# Altium PCB quark_dog_driver.PcbDoc (part 2 of 3)
Units mil, origin at the board's own origin, x right, y up, seen from the top; angles counter-clockwise.
Board outline 3937.01 x 2362.2 mil, 4 copper layers (Top Layer 1, signal1, signal2, Bottom Layer 1), stack 23.756 mil thick; 353 components, 275 nets, 1099 pads, 468 vias.
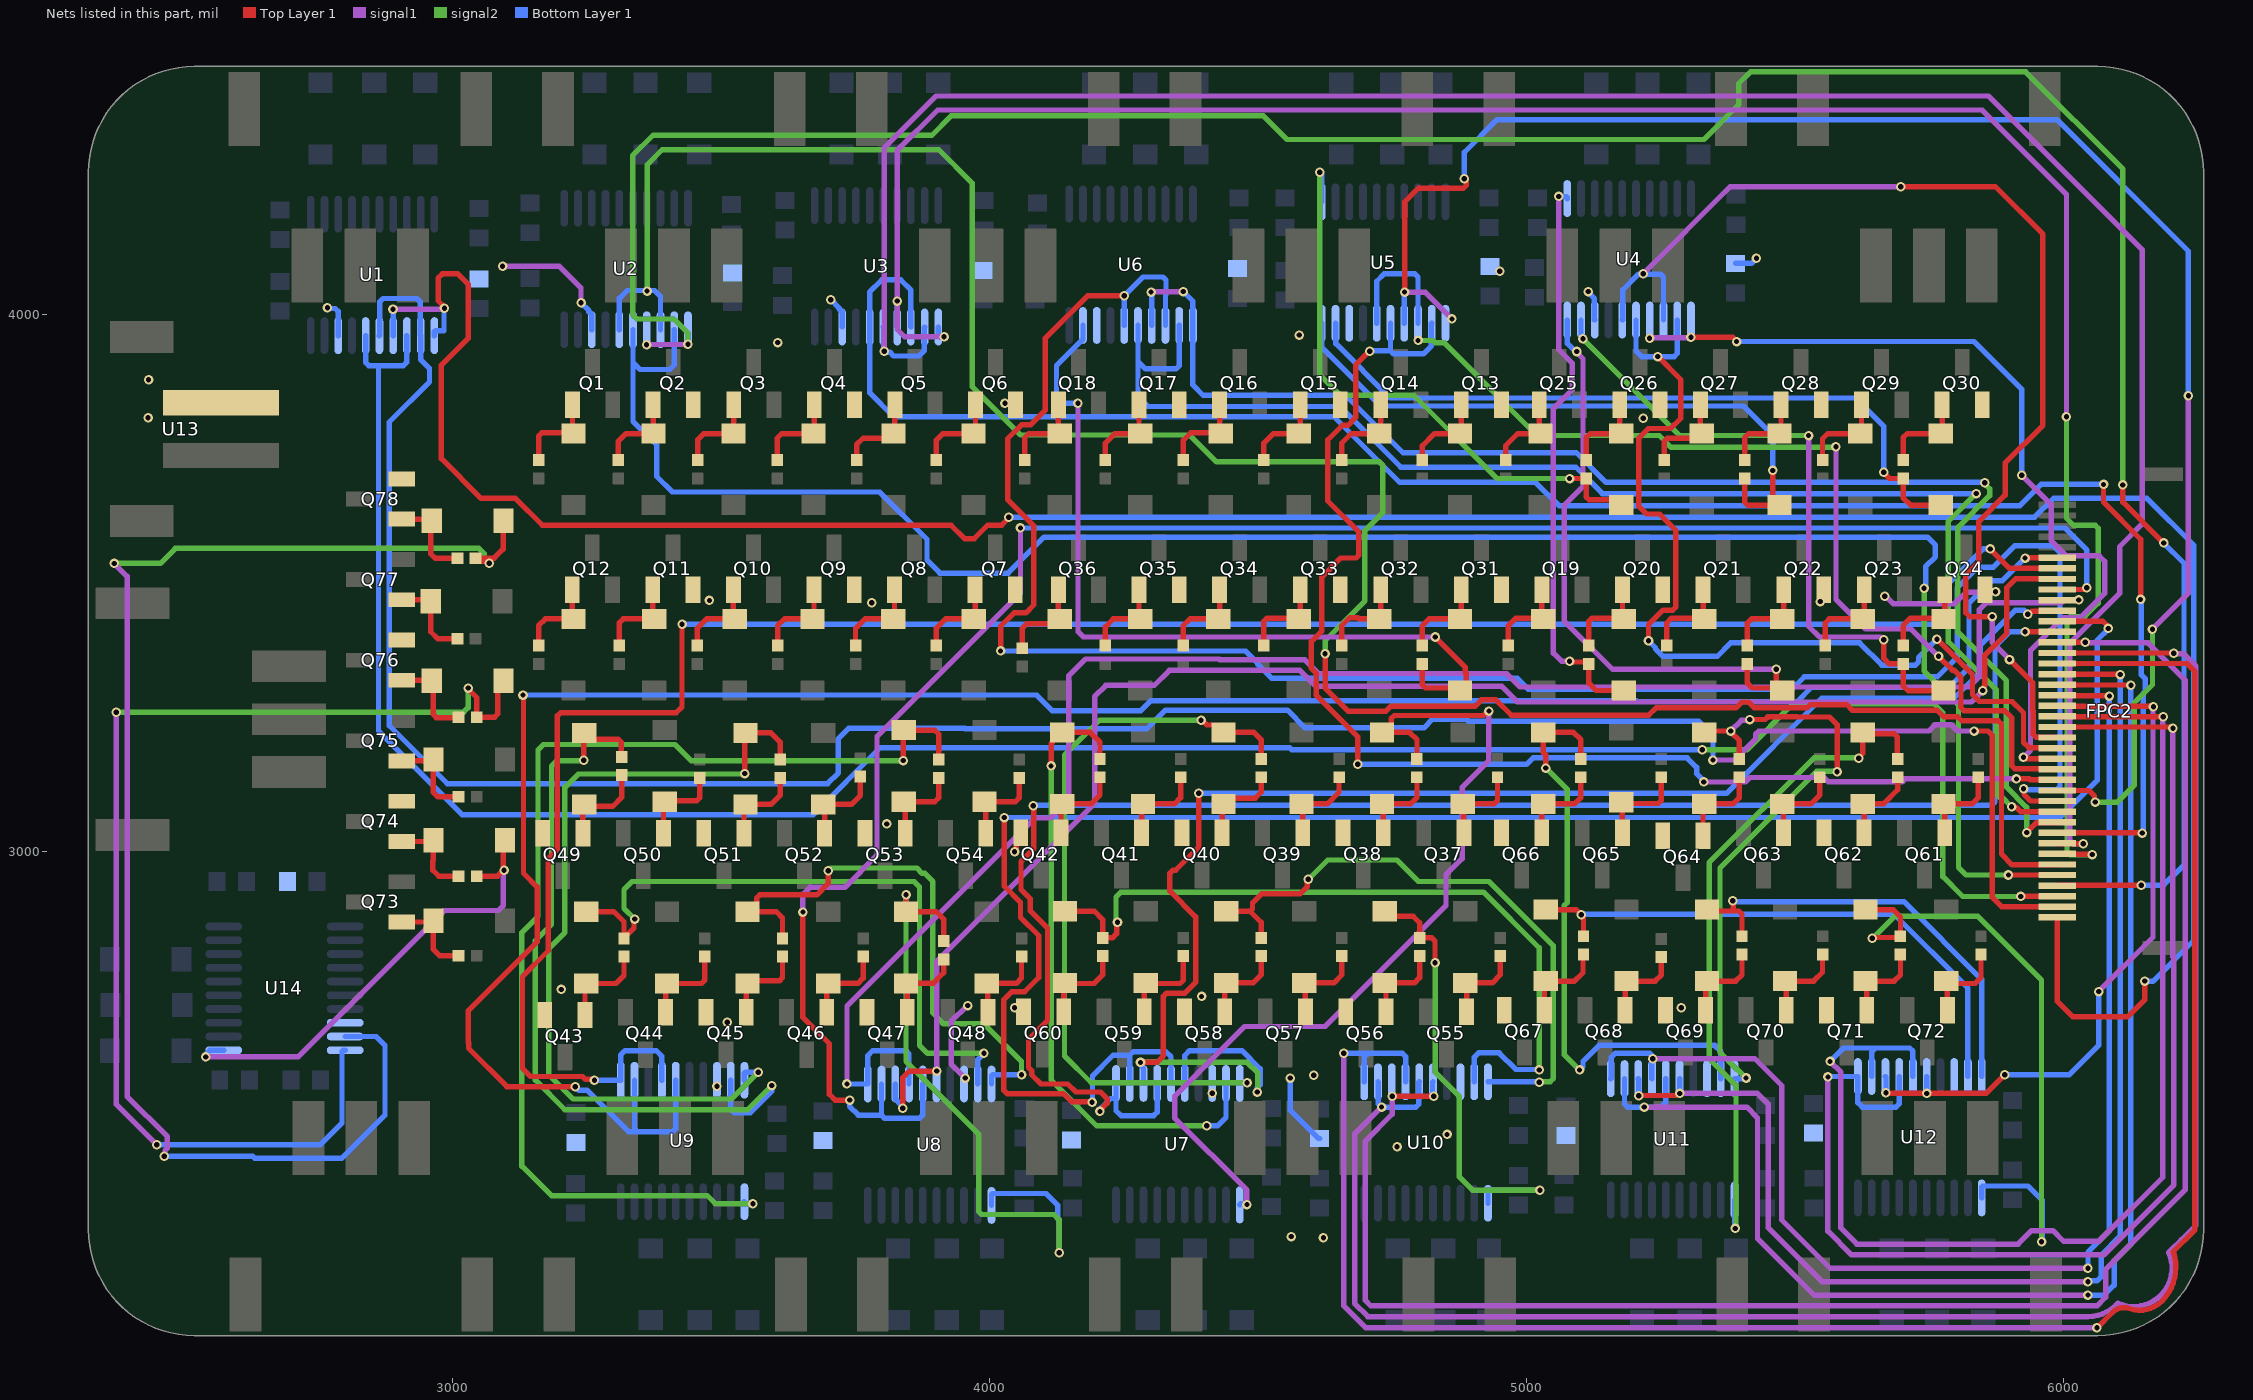
[diagram p4: the nets of this part, all layers, seen from the top]

## Via types
v1: diameter 17.72, hole 9.84, Top Layer 1 to Bottom Layer 1, tented both sides, 410 vias
v2: diameter 30, hole 15, Top Layer 1 to Bottom Layer 1, tented both sides, 54 vias
v3: diameter 78.74, hole 78.74, Top Layer 1 to Bottom Layer 1, 4 vias

## Nets (pads, with @x,y where several pads share a name; then routed paths per layer and width w, separated by ;. In a path a pad name is that pad's centre, name@x,y a point inside that pad or via, vN(x,y) a via of type N, cw(c..) or ccw(c..) an arc to the next point about the centre after c; other vN are vias at no path point) (continued)
LO4_3: D47.1 R32.1 U6.9 | length 1535.6
  Top Layer 1 w10: R32.1@4806,3349.99 4806,3310.86 4811.86,3305 4871.4,3305 D47.1@4876,3300.4 4887.58,3311.97 4887.58,3332.42 4885.86,3334.14 4885.86,3344.14 v1(4830,3400)
  signal1 w10: v1(4165,3835) 4165,3410 4175,3400 v1(4830,3400)
  Bottom Layer 1 w10: v1(4165,3835) 4135,3835 4125,3845 4125,3905 4155.71,3935.71 4155.82,3935.71 4170.82,3950.71 4170.96,3950.71 4174.3,3954.05 U6.9@4174.3,3980
LO5_1: D41.1 R26.1 U5.11 | length 1114.5
  Top Layer 1 w10: v1(5080,3695) R26.1@5111,3694.99 5111,3661 5116.86,3655.15 5166.25,3655.15 D41.1@5176,3645.4
  signal2 w10: v1(4615,4265) 4615,3888.69 4653.69,3850 4790,3850 4945,3695 v1(5080,3695)
  Bottom Layer 1 w10: v1(4615,4265) 4618.85,4261.15 U5.11@4618.85,4210.06
LO5_2: D42.1 R27.1 U5.10 | length 1199.2
  Top Layer 1 w10: R27.1@5406,3694.99 5406,3650.86 5411.86,3645 5470.61,3645 D42.1@5471,3645.4 5458.04,3658.36 v1(5458.04,3710.04)
  Bottom Layer 1 w10: U5.10@4618.85,3984 4618.85,3939.15 4728,3830 5403.78,3830 5458.04,3775.74 v1(5458.04,3710.04)
LO5_3: D44.1 R29.1 U5.9 | length 1360.6
  Top Layer 1 w10: v1(5665,3706.86) 5665,3705.37 5675.37,3694.99 R29.1@5701,3694.99 5701,3659 5714.6,3645.4 D44.1@5771,3645.4
  Bottom Layer 1 w10: U5.9@4644.44,3984 4644.96,3983.48 4644.96,3946.04 4746,3845 5612.04,3845 5665,3792.04 v1(5665,3706.86)
LO6_1: D32.1 R20.1 U4.11 | length 1074.4
  Top Layer 1 w10: v1(5080,3355) 5081.48,3353.52 5112.47,3353.52 R20.1@5116,3349.99 5116,3314 5129.6,3300.4 D32.1@5181,3300.4
  signal1 w10: v1(5060,4220) 5060,3935 5085,3910 5085,3860 5050,3825 5050,3370 5065,3355 v1(5080,3355)
  Bottom Layer 1 w10: v1(5060,4220) 5073.85,4220 5075.85,4218 U4.11@5075.85,4216.06
LO6_2: D33.1 R21.1 U4.10 | length 1164.8
  Top Layer 1 w10: R21.1@5411,3349.99 5411,3314 5420,3305 D33.1@5471.4,3305 ; v1(5465,3340) 5465,3311.4 D33.1@5471.4,3305 ; D33.1@5476,3300.4 D33.1@5471.4,3305
  signal1 w10: v1(5093.57,3931.43) 5093.57,3929.34 5105,3917.91 5105,3680 5070,3645 5070,3430 5160,3340 v1(5465,3340)
  Bottom Layer 1 w10: U4.10@5075.85,3990 5075.85,3946.26 5076.4,3945.71 5077.2,3945.71 5091.48,3931.43 v1(5093.57,3931.43)
LO6_3: D35.1 R23.1 U4.9 | length 1231.4
  Top Layer 1 w10: v1(5665,3395) 5665,3360 5675,3350 R23.1@5701,3349.99 5701,3309 5710,3300 5775.61,3300 D35.1@5776,3300.4
  signal1 w10: v1(5525,3775) 5525,3420 5545,3400 5660,3400 v1(5665,3395)
  signal2 w10: v1(5105,3955) 5285,3775 v1(5525,3775)
  Bottom Layer 1 w10: U4.9@5101.44,3990 5101.44,3961.7 5105,3958.14 v1(5105,3955)
LO7_1: D104.1 R71.1 U12.11 | length 1248.7
  Top Layer 1 w10: D104.1@5631,2892.6 5682.4,2892.6 5696,2879 R71.1@5696,2843.01 5693.57,2840.58 5645.08,2840.58 v1(5643.61,2839.11)
  signal2 w10: v1@5645,2840 5685,2880 5840,2880 5958.61,2761.39 v1(5958.61,2274.11)
  Bottom Layer 1 w10: U12.11@5847.15,2355.94 5847.15,2376.19 5849.15,2378.19 5933.19,2378.19 5960,2351.39 v1@5960,2275
LO7_2: D103.1 R70.1 U12.10 | length 833.2
  Top Layer 1 w10: D103.1@5336,2892.6 5338.6,2890 5385,2890 ; v1(5383.61,2909.11) 5385,2907.71 5385,2890 ; R70.1@5401,2843.01 5401,2884 5395,2890 5385,2890
  Bottom Layer 1 w10: v1@5385,2910 5387.5,2907.5 5702.5,2907.5 5847.15,2762.85 U12.10@5847.15,2582
LO7_3: D101.1 R68.1 U12.9 | length 1051.2
  Top Layer 1 w10: D101.1@5036,2892.6 5092.4,2892.6 5106,2879 R68.1@5106,2843.01
  Bottom Layer 1 w10: v1@5103.29,2883.63 5684.48,2883.63 5821.56,2746.56 U12.9@5821.56,2582
  other v1: 5101.9,2882.74
LO8_1: D95.1 R62.1 U11.11 | length 1276.7
  Top Layer 1 w10: v1(5618.61,3174.11) 5618.61,3176.19 5626,3183.58 D95.1@5626,3222.6 5628.6,3220 5684.14,3220 5690,3214.14 5690,3174.01 R62.1@5691,3173.01
  signal2 w10: v1(5388.61,2299.11) 5390,2300.5 5390,2565 5340,2615 5340,2980 5535,3175 v1@5620,3175
  Bottom Layer 1 w10: U11.11@5387.15,2351.94 5387.15,2302.85 v1@5390,2300
LO8_2: D96.1 R63.1 U11.10 | length 1141.3
  Top Layer 1 w10: D96.1@5331,3222.6 5333.39,3225 v1(5380,3225) 5380,3223.25 5396,3207.26 R63.1@5396,3173.01 ; v1(5415.33,3246.33) 5444.25,3246.33 5449.22,3251.3 5502.78,3251.3 5503.08,3251 5564,3251 5578.03,3236.97 v1(5578.03,3149.26)
  signal1 w10: v1(5380,3225) 5399.86,3244.86 5413.86,3244.86 v1(5415.33,3246.33)
  signal2 w10: v1(5408.61,2579.11) 5392.11,2595.61 5390.61,2595.61 5360,2626.21 5360,2970 5540,3150 v1@5580,3150
  Bottom Layer 1 w10: U11.10@5387.15,2578 5408,2578 v1@5410,2580
LO8_3: D98.1 R65.1 U11.9 | length 1107.2
  Top Layer 1 w10: v1@5036,3156.16 5036,3180 5031,3185 D98.1@5031,3222.6 5087.4,3222.6 5101,3209 R65.1@5101,3173.01
  signal2 w10: v1(5036.02,3156.14) 5075.86,3116.3 5075.86,2905.86 5070,2900 5070,2622.71 v1(5098.61,2594.11)
  Bottom Layer 1 w10: v1@5105,2600 5105,2610 5135,2640 5350,2640 5361.56,2628.44 U11.9@5361.56,2578
LO9_1: D86.1 R56.1 U10.11 | length 871.1
  Top Layer 1 w10: D86.1@4736,2889.5 4745.5,2880 4789.14,2880 4801,2868.15 R56.1@4801,2839.91 4823.82,2839.91 4829.68,2834.05 v1(4829.68,2793.87)
  signal2 w10: v1(4829.68,2793.87) 4830,2793.55 4830,2590 4875,2545 4875,2395 4900,2370 v1(5025,2370)
  Bottom Layer 1 w10: U10.11@4928.15,2345.94 4928.15,2368 4930.15,2370 v1(5025,2370)
LO9_2: D87.1 R57.1 U10.10 | length 1157.4
  Top Layer 1 w10: D87.1@4441,2889.5 4485.5,2889.5 ; R57.1@4506,2839.91 4506,2869 4485.5,2889.5 ; v1(4593.61,2949.11) 4592.13,2947.63 4592.13,2935.86 4578.27,2922 4507,2922 4490,2905 4490,2894.01 4485.5,2889.5
  signal2 w10: v1@4595,2950 4630,2985 4758.73,2985 4798.73,2945 4930,2945 5050,2825 5050,2578.32 5044.14,2572.47 5024.97,2572.47 v1(5023.61,2571.11)
  Bottom Layer 1 w10: U10.10@4928.15,2572 v1@5025,2572
LO9_3: D89.1 R59.1 U10.9 | length 1455.3
  Top Layer 1 w10: D89.1@4141,2889.5 4195.5,2889.5 4211,2874 R59.1@4211,2839.91 4229.14,2839.91 4237.13,2847.9 4237.13,2867.63 v1(4238.61,2869.11)
  signal2 w10: v1@4240,2870 4235.89,2874.11 4235.89,2915.9 4244.99,2925 4920,2925 5023.61,2821.39 v1(5023.61,2594.11)
  Bottom Layer 1 w10: U10.9@4902.56,2572 4902.56,2617.56 4910.86,2625.86 4949.14,2625.86 4980,2595 v1@5025,2595
LO10_1: D59.1 R38.1 U7.11 | length 1648.3
  Top Layer 1 w10: R38.1@4796,3173.01 4796,3209 4782.4,3222.6 D59.1@4731,3222.6 4734.31,3222.6 4748.01,3236.3 4748.01,3248.14 4753.87,3254 4920.28,3254 4928.43,3262.14 v1(4930,3262.14)
  signal1 w10: v1(4479.52,2343.47) 4479.52,2370.48 4345,2505 4345,2545 4475,2675 4625,2675 4850,2900 4850,2957.56 4880,2987.56 4880,3120 4930,3170 v1(4930,3262.14)
  Bottom Layer 1 w10: U7.11@4466.15,2342.94 4466.15,2343 4468.15,2345 v1@4480,2345
LO10_2: D60.1 R39.1 U7.10 | length 1379.4
  Top Layer 1 w10: v1(4394.14,3245) 4396.23,3245 4404.92,3236.3 4422.3,3236.3 D60.1@4436,3222.6 4492.6,3222.6 4506,3209.21 R39.1@4506,3173.01
  signal2 w10: v1@4395,3245 4205,3245 4140,3180 4140,2620 4189.72,2570.28 v1(4479.7,2570.28)
  Bottom Layer 1 w10: U7.10@4466.15,2569 4467.15,2570 v1@4480,2570
LO10_3: D62.1 R41.1 U7.9 | length 1198.1
  Top Layer 1 w10: v1(4115,3160) 4115,3201.61 4118.36,3204.97 4118.36,3208.9 4132.06,3222.6 D62.1@4136,3222.6 4187.6,3222.6 4206,3204.21 R41.1@4206,3173.01
  signal2 w10: v1(4115,3160) 4115,2575 4200,2490 v1(4405,2490)
  Bottom Layer 1 w10: v1(4405,2490) 4425,2490 4440.56,2505.56 U7.9@4440.56,2569
LO11_1: D68.1 R47.1 U8.11 | length 1253.9
  Top Layer 1 w10: v1(3845,2920) D68.1@3845,2888.6 3901.4,2888.6 3915,2875 R47.1@3915,2834.01
  signal2 w10: v1(3845,2920) 3845,2610 3980,2475 3980,2330.86 3985.86,2325 4120,2325 4130,2315 v1(4130,2253.83)
  Bottom Layer 1 w10: U8.11@4004.15,2341.94 4004.15,2362.14 4006.15,2364.14 4105.86,2364.14 4127.28,2342.72 4127.28,2317.55 4130,2314.84 v1(4130,2253.83)
LO11_2: D67.1 R46.1 U8.10 | length 1062
  Top Layer 1 w10: R46.1@3615,2839.01 3615,2877.21 3603.6,2888.6 D67.1@3550,2888.6 3553.31,2888.6 3567.01,2902.3 3567.01,2914.14 3572.87,2920 3679.14,2920 3700,2940.86 v1(3700,2965)
  signal2 w10: v1(3700,2965) 3705,2970 3865,2970 3875,2960 3880,2960 3895,2945 3895,2700 3915,2680 3990,2680 4060,2610 v1(4060,2585)
  Bottom Layer 1 w10: U8.10@4004.15,2568 4004.15,2583 4006.15,2585 v1(4060,2585)
LO11_3: D65.1 R44.1 U8.9 | length 1259.1
  Top Layer 1 w10: D65.1@3250,2888.6 3301.4,2888.6 3320,2870 R44.1@3320,2839.52 ; R44.1@3320,2839.01 R44.1@3320,2839.52 ; v1(3340,2875) 3338.52,2873.52 3338.52,2858.04 R44.1@3320,2839.52
  signal2 w10: v1(3340,2875) 3320,2895 3320,2930 3335,2945 3860,2945 3870,2935 3870,2640 3885,2625 v1(3990,2625)
  Bottom Layer 1 w10: U8.9@3978.56,2568 3978.56,2613.56 v1(3990,2625)
LO12_1: D77.1 R53.1 U9.11 | length 2133.8
  Top Layer 1 w10: v1(3840,3170) 3840,3225.63 D77.1@3841,3226.63 3898.37,3226.63 3906,3219 R53.1@3906,3172.04
  signal2 w10: v1(3560,2345) 3490,2345 3475,2360 3185,2360 3130,2415 3130,2850 3160,2880 3160,3190 3170,3200 3415,3200 3445,3170 v1(3840,3170)
  Bottom Layer 1 w10: U9.11@3544.15,2348.97 3544.15,2347 3546.15,2345 v1(3560,2345)
LO12_2: D76.1 R52.1 U9.10 | length 1542.6
  Top Layer 1 w10: v1(3545,3145.86) 3545,3220.63 D76.1@3546,3221.63 3593.37,3221.63 3611,3204 R52.1@3611,3172.04
  signal2 w10: v1(3545,3145.86) 3544.14,3145 3235,3145 3210,3120 3210,2850 3180,2820 3180,2585 3225,2540 3520,2540 v1(3570,2590)
  Bottom Layer 1 w10: U9.10@3544.15,2575.03 3544.15,2588 3546.15,2590 v1(3570,2590)
LO12_3: D74.1 R50.1 U9.9 | length 1458.7
  Top Layer 1 w10: v1(3245.03,3170.52) 3245.03,3220.66 D74.1@3246,3221.63 3257.63,3210 3309.14,3210 3315,3204.14 3315,3178.04 R50.1@3316,3177.04
  signal2 w10: v1@3245,3170 3195,3170 3185,3160 3185,2865 3155,2835 3155,2575 3210,2520 3550,2520 v1(3595,2565)
  Bottom Layer 1 w10: U9.9@3518.56,2575.03 3518.56,2521.44 3525.8,2514.2 3555.04,2514.2 3595,2554.16 v1(3595,2565)
LO13_1: D113.1 R74.1 U14.11 | length 893.9
  Top Layer 1 w10: R74.1@3045.9,2954.85 3084.85,2954.85 3095,2965 3095,3018.32 D113.1@3098.52,3021.84
  signal1 w10: v1(2541.26,2618.38) 2713.38,2618.38 2985.98,2890.98 3086.32,2890.98 3095.52,2900.18 v1@3095.52,2966.04
  Bottom Layer 1 w10: v1@2540,2615 2540,2621.79 2548.99,2630.78 U14.11@2574.94,2630.78
  other v1: 3096.78,2966.02
LO13_2: D114.1 R75.1 U14.10 | length 2201.6
  Top Layer 1 w10: v1(3030,3305) 3030,3303.05 3045.9,3287.15 R75.1@3045.9,3250.85 3079.14,3250.85 3085,3256.7 3085,3308.04 D114.1@3095.49,3318.53
  signal1 w10: v1(2375,3260) 2375,2530 v1(2450,2455)
  signal2 w10: v1(2375,3260) 3021.39,3260 3030,3268.61 v1(3030,3305)
  Bottom Layer 1 w10: v1(2450,2455) 2755,2455 2795,2495 2795,2628.78 2797,2630.78 U14.10@2801,2630.78
LO13_3: D116.1 R77.1 U14.9 | length 2669
  Top Layer 1 w10: v1(3069.23,3537.54) 3067.15,3537.54 3063.47,3541.21 3049.56,3541.21 R77.1@3043.93,3546.84 3078.16,3546.84 3095,3563.69 3095,3615.83 D116.1@3095.49,3616.32
  signal1 w10: v1(2371.01,3537.01) 2395,3513.01 2395,2545 2470,2470 2470,2448.33 2465.71,2444.04 2465.71,2435.15 v1(2464.23,2433.68)
  signal2 w10: v1(2371.01,3537.01) 2457.01,3537.01 2485,3565 3050,3565 3060.01,3554.99 3060.01,3548.84 3069.23,3539.62 v1(3069.23,3537.54)
  Bottom Layer 1 w10: v1(2464.23,2433.68) 2628.82,2433.68 2632.5,2430 2795,2430 2875,2510 2875,2640 2858.63,2656.37 U14.9@2801,2656.37
NetD4_2: D4.2 Q2.1 R2.2 | length 161.2
  Top Layer 1 w10: R2.2@3309,3729.07 3309,3764 3323.66,3778.66 D4.2@3374.9,3778.66 3374.18,3779.38 Q2.1@3374.18,3832.66
NetD5_2: D5.2 Q1.1 R1.2 | length 164
  Top Layer 1 w10: R1.2@3161,3729.07 3161,3774.14 3166.86,3780 3224.67,3780 3224.18,3780.49 Q1.1@3224.18,3832.66
NetD6_2: D6.2 Q4.1 R3.2 | length 166.8
  Top Layer 1 w10: R3.2@3605,3729.07 3605,3770 3613.67,3778.66 D6.2@3672.68,3778.66 3674.18,3780.16 Q4.1@3674.18,3832.66
NetD7_2: D7.2 Q3.1 R4.2 | length 163.7
  Top Layer 1 w10: R4.2@3457,3729.07 3457,3767 3468.66,3778.66 D7.2@3523.79,3778.66 3524.18,3779.05 Q3.1@3524.18,3832.66
NetD8_2: D8.2 Q6.1 R5.2 | length 167.2
  Top Layer 1 w10: R5.2@3901,3729.07 3901,3766 3913.66,3778.66 D8.2@3970.47,3778.66 3974.18,3782.37 Q6.1@3974.18,3832.66
NetD9_2: D9.2 Q5.1 R6.2 | length 161.1
  Top Layer 1 w10: R6.2@3753,3729.07 3753,3758 3765,3770 3812.91,3770 D9.2@3821.58,3778.66 3824.18,3781.26 Q5.1@3824.18,3832.66
NetD10_2: D10.2 Q8.1 R7.2 | length 164.3
  Top Layer 1 w10: R7.2@3751,3384.07 3751,3416 3768.66,3433.66 D10.2@3821,3433.66 3823.6,3436.26 Q8.1@3823.6,3487.66
NetD11_2: D11.2 Q7.1 R8.2 | length 164.3
  Top Layer 1 w10: R8.2@3901,3384.07 3901,3416 3918.66,3433.66 D11.2@3971,3433.66 3973.6,3436.26 Q7.1@3973.6,3487.66
NetD12_2: D12.2 Q10.1 R9.2 | length 164.2
  Top Layer 1 w10: R9.2@3456,3384.07 3456,3416 3473.66,3433.66 D12.2@3526,3433.66 3523.6,3436.07 Q10.1@3523.6,3487.66
NetD13_2: D13.2 Q9.1 R10.2 | length 162.3
  Top Layer 1 w10: R10.2@3606,3384.07 3606,3421 3618.66,3433.66 D13.2@3671,3433.66 3673.6,3436.26 Q9.1@3673.6,3487.66
NetD14_2: D14.2 Q11.1 R11.2 | length 165.1
  Top Layer 1 w10: R11.2@3311,3384.07 3311,3426 3318.66,3433.66 D14.2@3376,3433.66 3373.6,3436.07 Q11.1@3373.6,3487.66
NetD15_2: D15.2 Q12.1 R12.2 | length 162.2
  Top Layer 1 w10: R12.2@3161,3384.07 3161,3421 3173.66,3433.66 D15.2@3226,3433.66 3223.6,3436.07 Q12.1@3223.6,3487.66
NetD19_2: D19.2 Q14.1 R13.2 | length 164.3
  Top Layer 1 w10: R13.2@4656,3729.07 4656,3761 4673.66,3778.66 D19.2@4726,3778.66 4728.6,3781.26 Q14.1@4728.6,3832.66
NetD20_2: D20.2 Q13.1 R14.2 | length 161.4
  Top Layer 1 w10: R14.2@4806,3729.07 4806,3756 4828.66,3778.66 D20.2@4876,3778.66 4878.6,3781.26 Q13.1@4878.6,3832.66
NetD21_2: D21.2 Q16.1 R15.2 | length 166.4
  Top Layer 1 w10: R15.2@4361,3729.07 4361,3766 4375,3780 D21.2@4429.67,3780 ; Q16.1@4428.6,3832.66 4428.6,3781.07 D21.2@4429.67,3780 ; D21.2@4431,3778.66 D21.2@4429.67,3780
NetD22_2: D22.2 Q15.1 R16.2 | length 159.3
  Top Layer 1 w10: R16.2@4511,3729.07 4511,3761 4528.66,3778.66 D22.2@4576,3778.66 4578.6,3781.26 Q15.1@4578.6,3832.66
NetD23_2: D23.2 Q17.1 R17.2 | length 159.2
  Top Layer 1 w10: R17.2@4216,3729.07 4216,3761 4233.66,3778.66 D23.2@4281,3778.66 4278.6,3781.07 Q17.1@4278.6,3832.66
NetD24_2: D24.2 Q18.1 R18.2 | length 165.1
  Top Layer 1 w10: R18.2@4066,3729.07 4066,3771 4073.66,3778.66 D24.2@4131,3778.66 4128.6,3781.07 Q18.1@4128.6,3832.66
NetD31_2: D31.2 Q19.1 R19.2 | length 161.4
  Top Layer 1 w10: R19.2@4966,3384.07 4966,3421 4980,3435 D31.2@5029.67,3435 ; Q19.1@5028.6,3487.66 5028.6,3436.07 D31.2@5029.67,3435 ; D31.2@5031,3433.66 D31.2@5029.67,3435
NetD32_2: D32.2 Q20.1 R20.2 | length 166.2
  Top Layer 1 w10: R20.2@5116,3384.07 5116,3429.14 5121.86,3435 D32.2@5179.67,3435 ; Q20.1@5178.6,3487.66 5178.6,3436.07 D32.2@5179.67,3435 ; D32.2@5181,3433.66 D32.2@5179.67,3435
NetD33_2: D33.2 Q22.1 R21.2 | length 165.2
  Top Layer 1 w10: R21.2@5411,3384.07 5411,3426 5418.66,3433.66 D33.2@5476,3433.66 5478.6,3436.26 Q22.1@5478.6,3487.66
NetD34_2: D34.2 Q21.1 R22.2 | length 169.3
  Top Layer 1 w10: R22.2@5261,3384.07 5261,3426 5270,3435 D34.2@5329.67,3435 ; Q21.1@5328.6,3487.66 5328.6,3436.07 D34.2@5329.67,3435 ; D34.2@5331,3433.66 D34.2@5329.67,3435
NetD35_2: D35.2 Q24.1 R23.2 | length 173.4
  Top Layer 1 w10: R23.2@5701,3384.07 5701,3421 5715,3435 5774.67,3435 D35.2@5776,3433.66 5778.6,3436.26 Q24.1@5778.6,3487.66
NetD36_2: D36.2 Q23.1 R24.2 | length 170.2
  Top Layer 1 w10: R24.2@5556,3384.07 5556,3426 5563.66,3433.66 D36.2@5626,3433.66 5628.6,3436.26 Q23.1@5628.6,3487.66
NetD40_2: D40.2 Q25.1 R25.2 | length 156.3
  Top Layer 1 w10: R25.2@4961,3729.07 4961,3756 4983.66,3778.66 D40.2@5026,3778.66 5023.6,3781.07 Q25.1@5023.6,3832.66
NetD41_2: D41.2 Q26.1 R26.2 | length 165.1
  Top Layer 1 w10: R26.2@5111,3729.07 5111,3771 5118.66,3778.66 D41.2@5176,3778.66 5173.6,3781.07 Q26.1@5173.6,3832.66
NetD42_2: D42.2 Q28.1 R27.2 | length 165.2
  Top Layer 1 w10: R27.2@5406,3729.07 5406,3771 5413.66,3778.66 D42.2@5471,3778.66 5473.6,3781.26 Q28.1@5473.6,3832.66
NetD43_2: D43.2 Q27.1 R28.2 | length 166.1
  Top Layer 1 w10: R28.2@5256,3729.07 5256,3764.14 5261.86,3770 5317.34,3770 D43.2@5326,3778.66 5323.6,3781.07 Q27.1@5323.6,3832.66
NetD44_2: D44.2 Q30.1 R29.2 | length 170.2
  Top Layer 1 w10: R29.2@5701,3729.07 5701,3771 5708.66,3778.66 D44.2@5771,3778.66 5773.6,3781.26 Q30.1@5773.6,3832.66
NetD45_2: D45.2 Q29.1 R30.2 | length 169
  Top Layer 1 w10: R30.2@5551,3729.07 5551,3769 5560.67,3778.66 D45.2@5621,3778.66 5623.6,3781.26 Q29.1@5623.6,3832.66
NetD46_2: D46.2 Q32.1 R31.2 | length 169.1
  Top Layer 1 w10: R31.2@4656,3384.07 4656,3421 4670.86,3435.86 4686.17,3435.86 4688.36,3433.66 D46.2@4726,3433.66 4728.6,3436.26 Q32.1@4728.6,3487.66
NetD47_2: D47.2 Q31.1 R32.2 | length 167.3
  Top Layer 1 w10: R32.2@4806,3384.07 4806,3421 4818.66,3433.66 D47.2@4876,3433.66 4878.6,3436.26 Q31.1@4878.6,3487.66
NetD48_2: D48.2 Q34.1 R33.2 | length 162.3
  Top Layer 1 w10: R33.2@4361,3384.07 4361,3421 4373.66,3433.66 D48.2@4426,3433.66 4428.6,3436.26 Q34.1@4428.6,3487.66
NetD49_2: D49.2 Q33.1 R34.2 | length 168.1
  Top Layer 1 w10: R34.2@4511,3384.07 4511,3429.14 4516.86,3435 4574.67,3435 D49.2@4576,3433.66 4578.6,3436.26 Q33.1@4578.6,3487.66
NetD50_2: D50.2 Q35.1 R35.2 | length 161
  Top Layer 1 w10: R35.2@4216,3384.07 4216,3419 4230.67,3433.66 D50.2@4281,3433.66 4278.6,3436.07 Q35.1@4278.6,3487.66
NetD51_2: D51.2 Q36.1 R36.2 | length 169.2
  Top Layer 1 w10: R36.2@4061,3379.07 4061,3416 4070,3425 4122.34,3425 D51.2@4131,3433.66 4128.6,3436.07 Q36.1@4128.6,3487.66
NetD58_2: D58.2 Q37.1 R37.2 | length 165.7
  Top Layer 1 w10: Q37.1@4883.4,3035.34 4883.4,3086.93 D58.2@4881,3089.34 4939.34,3089.34 4946,3096 R37.2@4946,3138.93
NetD59_2: D59.2 Q38.1 R38.2 | length 162.8
  Top Layer 1 w10: Q38.1@4733.4,3035.34 4733.4,3086.93 D59.2@4731,3089.34 4784.34,3089.34 4796,3101 R38.2@4796,3138.93
NetD60_2: D60.2 Q40.1 R39.2 | length 162
  Top Layer 1 w10: Q40.1@4433.4,3035.34 4433.4,3086.74 D60.2@4436,3089.34 4446.66,3100 4495,3100 4506,3111 R39.2@4506,3138.93
NetD61_2: D61.2 Q39.1 R40.2 | length 161.9
  Top Layer 1 w10: Q39.1@4583.4,3035.34 4583.4,3086.93 D61.2@4581,3089.34 4629.34,3089.34 4651,3111 R40.2@4651,3138.93
NetD62_2: D62.2 Q42.1 R41.2 | length 164.9
  Top Layer 1 w10: Q42.1@4133.4,3035.34 4133.4,3086.74 D62.2@4136,3089.34 4189.34,3089.34 4206,3106 R41.2@4206,3138.93
NetD63_2: D63.2 Q41.1 R42.2 | length 167.8
  Top Layer 1 w10: Q41.1@4283.4,3035.34 4283.4,3086.74 D63.2@4286,3089.34 4344.34,3089.34 4356,3101 R42.2@4356,3138.93
NetD64_2: D64.2 Q44.1 R43.2 | length 171
  Top Layer 1 w10: Q44.1@3397.4,2701.34 3397.4,2752.07 3400.33,2755 3464.14,2755 3470,2760.86 R43.2@3470,2804.93
NetD65_2: D65.2 Q43.1 R44.2 | length 171.4
  Top Layer 1 w10: Q43.1@3247.4,2696.34 3247.4,2752.74 D65.2@3250,2755.34 3250.33,2755 3305,2755 3320,2770 R44.2@3320,2804.93
NetD66_2: D66.2 Q46.1 R45.2 | length 164
  Top Layer 1 w10: Q46.1@3697.4,2701.34 3697.4,2752.74 D66.2@3700,2755.34 3755.34,2755.34 3765,2765 R45.2@3765,2804.93
NetD67_2: D67.2 Q45.1 R46.2 | length 163.5
  Top Layer 1 w10: Q45.1@3547.4,2701.34 3547.4,2752.74 D67.2@3550,2755.34 3554.66,2760 3609.14,2760 3615,2765.86 R46.2@3615,2804.93
NetD68_2: D68.2 Q47.1 R47.2 | length 158.1
  Top Layer 1 w10: Q47.1@3847.4,2701.34 3847.4,2752.93 D68.2@3845,2755.34 3895.34,2755.34 3915,2775 R47.2@3915,2799.93
NetD69_2: D69.2 Q48.1 R48.2 | length 163.9
  Top Layer 1 w10: Q48.1@3997.4,2701.34 3997.4,2752.93 D69.2@3995,2755.34 4050.34,2755.34 4060,2765 R48.2@4060,2804.93
NetD73_2: D73.2 Q50.1 R49.2 | length 165.3
  Top Layer 1 w10: Q50.1@3393.4,3034.37 3393.4,3090.77 D73.2@3396,3093.37 3397.63,3095 3455.14,3095 3461,3100.86 R49.2@3461,3137.96
NetD74_2: D74.2 Q49.1 R50.2 | length 174.6
  Top Layer 1 w10: Q49.1@3243.4,3034.37 3243.4,3085.77 D74.2@3246,3088.37 3249.37,3085 3299.14,3085 3316,3101.86 R50.2@3316,3142.96
NetD75_2: D75.2 Q52.1 R51.2 | length 165.8
  Top Layer 1 w10: Q52.1@3693.4,3034.37 3693.4,3085.96 D75.2@3691,3088.37 3743.37,3088.37 3760,3105 R51.2@3760,3139.93
NetD76_2: D76.2 Q51.1 R52.2 | length 159.3
  Top Layer 1 w10: Q51.1@3543.4,3034.37 3543.4,3085.77 D76.2@3546,3088.37 3593.37,3088.37 3611,3106 R52.2@3611,3137.96
NetD77_2: D77.2 Q53.1 R53.2 | length 165.1
  Top Layer 1 w10: Q53.1@3843.4,3034.37 3843.4,3090.96 D77.2@3841,3093.37 3898.37,3093.37 3906,3101 R53.2@3906,3137.96
NetD78_2: D78.2 Q54.1 R54.2 | length 165.1
  Top Layer 1 w10: Q54.1@3993.4,3034.37 3993.4,3090.96 D78.2@3991,3093.37 4048.37,3093.37 4056,3101 R54.2@4056,3137.96
NetD85_2: D85.2 Q55.1 R55.2 | length 160.9
  Top Layer 1 w10: Q55.1@4888.4,2702.24 4888.4,2753.83 D85.2@4886,2756.24 4936.24,2756.24 4951,2771 R55.2@4951,2805.83
NetD86_2: D86.2 Q56.1 R56.2 | length 163.9
  Top Layer 1 w10: Q56.1@4738.4,2702.24 4738.4,2753.83 D86.2@4736,2756.24 4791.24,2756.24 4801,2766 R56.2@4801,2805.83
NetD87_2: D87.2 Q58.1 R57.2 | length 161
  Top Layer 1 w10: Q58.1@4438.4,2702.24 4438.4,2748.4 4441,2751 D87.2@4441,2756.24 4491.24,2756.24 4506,2771 R57.2@4506,2805.83
NetD88_2: D88.2 Q57.1 R58.2 | length 165.9
  Top Layer 1 w10: Q57.1@4588.4,2702.24 4588.4,2753.83 D88.2@4586,2756.24 4641.24,2756.24 4656,2771 R58.2@4656,2805.83
NetD89_2: D89.2 Q60.1 R59.2 | length 167
  Top Layer 1 w10: Q60.1@4138.4,2702.24 4138.4,2753.64 D89.2@4141,2756.24 4142.23,2755 4195,2755 4211,2771 R59.2@4211,2805.83
NetD90_2: D90.2 Q59.1 R60.2 | length 172.9
  Top Layer 1 w10: Q59.1@4288.4,2702.24 4288.4,2753.64 D90.2@4291,2756.24 4292.23,2755 4355,2755 4361,2761 R60.2@4361,2805.83
NetD94_2: D94.2 Q61.1 R61.2 | length 162.8
  Top Layer 1 w10: Q61.1@5778.4,3035.34 5778.4,3086.93 D94.2@5776,3089.34 5829.34,3089.34 5841,3101 R61.2@5841,3138.93
NetD95_2: D95.2 Q62.1 R62.2 | length 154
  Top Layer 1 w10: Q62.1@5628.4,3035.34 5628.4,3086.93 D95.2@5626,3089.34 5664.34,3089.34 5691,3116 R62.2@5691,3138.93
NetD96_2: D96.2 Q64.1 R63.2 | length 167.8
  Top Layer 1 w10: Q64.1@5328.4,3030.34 5328.4,3086.74 D96.2@5331,3089.34 5384.34,3089.34 5396,3101 R63.2@5396,3138.93
NetD97_2: D97.2 Q63.1 R64.2 | length 164.8
  Top Layer 1 w10: Q63.1@5478.4,3035.34 5478.4,3086.93 D97.2@5476,3089.34 5529.34,3089.34 5546,3106 R64.2@5546,3138.93
NetD98_2: D98.2 Q66.1 R65.2 | length 167.8
  Top Layer 1 w10: Q66.1@5028.4,3035.34 5028.4,3086.74 D98.2@5031,3089.34 5089.34,3089.34 5101,3101 R65.2@5101,3138.93
NetD99_2: D99.2 Q65.1 R66.2 | length 176.1
  Top Layer 1 w10: D99.2@5176,3092.37 5178.37,3090 5245,3090 5251,3096 R66.2@5251,3138.93 ; Q65.1@5178.4,3035.34 D99.2@5178.4,3089.97
NetD100_2: D100.2 Q68.1 R67.2 | length 157.8
  Top Layer 1 w10: Q68.1@5183.4,2705.34 5183.4,2756.74 D100.2@5186,2759.34 5239.34,2759.34 5251,2771 R67.2@5251,2803.93
NetD101_2: D101.2 Q67.1 R68.2 | length 166.9
  Top Layer 1 w10: Q67.1@5033.4,2705.34 5033.4,2756.74 D101.2@5036,2759.34 5089.34,2759.34 5105,2775 5105,2809.93 R68.2@5106,2808.93
NetD102_2: D102.2 Q70.1 R69.2 | length 164.8
  Top Layer 1 w10: Q70.1@5483.4,2705.34 5483.4,2756.93 D102.2@5481,2759.34 5534.34,2759.34 5551,2776 R69.2@5551,2808.93
NetD103_2: D103.2 Q69.1 R70.2 | length 162.8
  Top Layer 1 w10: Q69.1@5333.4,2705.34 5333.4,2756.74 D103.2@5336,2759.34 5389.34,2759.34 5401,2771 R70.2@5401,2808.93
NetD104_2: D104.2 Q71.1 R71.2 | length 162.8
  Top Layer 1 w10: Q71.1@5633.4,2705.34 5633.4,2756.93 D104.2@5631,2759.34 5684.34,2759.34 5696,2771 R71.2@5696,2808.93
NetD105_2: D105.2 Q72.1 R72.2 | length 165.9
  Top Layer 1 w10: D105.2@5781,2759.34 D105.2@5783.4,2756.93 ; Q72.1@5783.4,2705.34 D105.2@5783.4,2756.93 ; R72.2@5846,2808.93 5846,2766 5835,2755 5785.33,2755 D105.2@5783.4,2756.93
NetD112_2: D112.2 Q73.1 R73.2 | length 164.8
  Top Layer 1 w10: Q73.1@2906.25,2869.44 2962.85,2869.44 D112.2@2965.25,2871.84 2965.25,2818.44 2976.85,2806.85 R73.2@3011.82,2806.85
NetD113_2: D113.2 Q74.1 R74.2 | length 168.7
  Top Layer 1 w10: Q74.1@2906.25,3019.44 2962.85,3019.44 D113.2@2965.25,3021.84 2965.25,2984.21 2964.14,2983.1 2964.14,2965.86 2975.15,2954.85 R74.2@3011.82,2954.85
NetD114_2: D114.2 Q76.1 R75.2 | length 169.8
  Top Layer 1 w10: Q76.1@2906.25,3319.44 2961.31,3319.44 D114.2@2962.22,3318.53 2965,3315.75 2965,3255.86 2970.86,3250 3010.97,3250 R75.2@3011.82,3250.85
NetD115_2: D115.2 Q75.1 R76.2 | length 171.1
  Top Layer 1 w10: Q75.1@2906.25,3169.44 2962.85,3169.44 D115.2@2965.25,3171.84 2965.25,3110.44 2972.85,3102.85 R76.2@3011.82,3102.85
NetD116_2: D116.2 Q78.1 R77.2 | length 172.7
  Top Layer 1 w10: Q78.1@2906.25,3619.44 2959.1,3619.44 D116.2@2962.22,3616.32 2960,3614.1 2960,3555 2968.16,3546.84 R77.2@3009.85,3546.84
NetD117_2: D117.2 Q77.1 R78.2 | length 167.1
  Top Layer 1 w10: Q77.1@2906.25,3469.44 2957.65,3469.44 D117.2@2960.25,3466.84 2960.25,3409.75 2973.16,3396.84 R78.2@3009.85,3396.84
PGND: C1.1 C8.1 C12.1 C13.1 C17.1 C24.1 C25.1 C32.1 C36.1 C37.1 C41.1 C48.1 C49.1 Q2.2 Q4.2 Q6.2 Q7.2 Q9.2 Q11.2 Q13.2 Q15.2 Q17.2 Q20.2 Q22.2 Q24.2 Q26.2 Q28.2 Q30.2 Q31.2 Q33.2 Q35.2 Q38.2 Q40.2 Q42.2 Q43.2 Q45.2 Q47.2 Q49.2 Q51.2 Q53.2 Q56.2 Q58.2 Q60.2 Q62.2 Q64.2 Q66.2 Q67.2 Q69.2 Q71.2 Q74.2 Q76.2 Q78.2 U1.8 U2.8 U3.8 U4.8 U5.8 U6.8 U7.8 U8.8 U9.8 U10.8 U11.8 U12.8 U13.1 U14.8 | length 1058.5
  Top Layer 1 w10: v1(4047,3000) 4047,3002.09 4049.82,3004.9 4049.82,3026.56 Q42.2@4058.59,3035.34 ; v1(5546.86,3465.95) 5553.4,3472.5 Q22.2@5553.4,3487.66
  signal1 w10: v1(3094,4090) 3200,4090 3240,4050 v1(3240,4022) ; v1(3955,2579) 3929,2605 3929,2684 3959,2714 v1(3960,2714) ; v1(5666.7,3475.67) 5668.79,3475.67 5682.46,3462 5797,3462 5818,3483 5872,3483 v1(5873,3484)
  Bottom Layer 1 w10: v1(2768,4013) 2769.48,4011.52 2782.55,4011.52 2787.93,4006.14 U1.8@2787.93,3961 ; v1(3240,4022) 3240.09,4022 3254.61,4007.48 3254.61,4005.72 3260.03,4000.3 U2.8@3260.03,3972 ; v1(3705,4028) 3705.09,4028 3720.61,4012.48 3720.61,4010.72 3726.03,4005.3 U3.8@3726.03,3977 ; v1(4560,2579) 4560,2519.23 4612.82,2466.41 C37.1@4614.78,2466.41 ; v1(5115,4043) 5115,4040.91 5126.21,4029.71 5126.21,3990.83 U4.8@5127.03,3990 ; C13.1@5389.22,4095.59 5418.58,4095.59 v1(5428,4105)
  other v1: 4622,2282 4562,2284 4759,2451 4852,2474 4415,2551 3493,2564 4603.86,2584 3512,2683 4047,2710 5288,2710 4395,2731 3203,2744 3809,3052 3781,3464 3479,3468 5217,3807 2434,3808 4029,3835 2435,3879 3606,3948 4577,3962 4950,4081
PWM1_1: FPC2.1 U1.1 U1.4 | length 5318.7
  Top Layer 1 w10: v1(2985.69,4012.12) 2985.69,4014.21 2974,4025.91 2974,4068 2982,4076 3011,4076 3030,4057 3030,3956 2980,3906 2980,3731.89 3053.72,3658.16 3117.84,3658.16 3168,3608 3929,3608 3954,3583 3972,3583 3997,3608 4023,3608 4036,3621 v1(4036,3623) v1@4036,3625 ; FPC2.1@5987.77,2878.17 5987.77,2722.23 6017,2693 6119,2693 6150.5,2724.5 v1(6150.5,2759.5)
  signal1 w10: v1(2890,4010) v1@2985,4010
  Bottom Layer 1 w10: v1(2890,4010) 2890.29,4009.71 U1.4@2890.29,3961 ; U1.1@2967.06,3961 2967.06,3968 2969.06,3970 2985,3970 2985,4011.43 v1(2985.69,4012.12) ; v1(4036,3623) 5945.91,3623 5980.91,3658 6155,3658 6242,3571 6242,2835 6166,2759 6151,2759 v1(6150.5,2759.5) v1@6150,2760
PWM1_2: FPC2.2 U1.2 U1.5 | length 4632.1
  Top Layer 1 w10: v1(5833,3225) 5859.05,3225 5867,3217.05 5867,2915 5884,2898 FPC2.2@5976,2898
  signal1 w10: v1(5347,3171) 5387,3171 5426.52,3210.52 5426.52,3219.14 5432.38,3225 5749.15,3225 5761.15,3237 5790.03,3237 5802.03,3225 v1(5833,3225)
  Bottom Layer 1 w10: U1.5@2864.7,3961 2865.53,3961.83 2865.53,4024.14 2871.39,4030 2934.78,4030 2940.64,4024.14 2940.64,3961.83 U1.2@2941.47,3961 2941.47,3916.53 2958,3900 2958,3875 2883,3800 2883,3235 2991,3127 3699,3127 3719,3147 3719,3211 3738,3230 3954,3230 3955,3229 4293,3229 4328,3264 4555,3264 4588,3231 4809,3231 4825,3247 4888,3247 4892,3243 5321,3243 5347,3217 v1(5347,3171)
PWM1_3: FPC2.3 U1.3 U1.6 | length 4467.4
  Top Layer 1 w10: v1(5920,2917) 5920.27,2917.27 5987.5,2917.27 FPC2.3@5987.77,2917.54
  signal2 w10: v1(5327,3190) 5410,3190 5496,3276 5758,3276 5775,3259 5775,2954 5812,2917 v1(5920,2917)
  Bottom Layer 1 w10: U1.6@2839.11,3961 2839.11,3910.89 2845,3905 2863,3905 ; U1.3@2915.85,3960.97 2915.85,3911.71 2909.14,3905 2863,3905 ; v1(5327,3190) 4562.96,3190 4558.96,3194 3797,3194 3672,3069 3019,3069 2863,3225 2863,3905
PWM2_1: FPC2.4 U2.1 U2.4 | length 5078.8
  Top Layer 1 w10: FPC2.4@5987.77,2937.22 5988.16,2937.61 6143.61,2937.61 v1(6144,2938) ; v1(6110,3683) 6110,3651 v1(6186,3575)
  signal1 w10: v1(3362,3944) 3362.5,3944.5 3438.5,3944.5 v1(3439,3945)
  signal2 w10: v1(3439,3945) 3439,3966 3413,3992 3343.86,3992 3338,3997.86 3338,3998 3336,4000 3336,4296 3374,4334 3893,4334 3929,4370 4510,4370 4554,4326 5330,4326 5395,4391 5395,4430.14 5416.86,4452 5929,4452 6110,4271 v1(6110,3683)
  Bottom Layer 1 w10: v1(6144,2938) 6186,2938 6223.72,2975.72 6223.72,3537.28 v1(6186,3575)
PWM2_2: FPC2.5 U2.2 U2.5 | length 3778.8
  Top Layer 1 w10: v1(5897,2957) v1(5897,2957) 5987.73,2956.95 FPC2.5@5987.77,2956.91
  signal2 w10: v1(5740,3491) 5740,3337 5804,3273 5804,2971 5818,2957 v1(5897,2957)
  Bottom Layer 1 w10: U2.5@3336.81,3972 3336.81,3911.19 ; U2.2@3413.58,3972 3413.58,3906.44 3405.14,3898 3350,3898 3336.81,3911.19 ; v1(5740,3491) 5743,3494 5743,3531 5761,3549 5761,3571 5746,3586 4102,3586 4035,3519 3908,3519 3884,3543 3884,3582 3796,3670 3410,3670 3381,3699 3381,3757 3336.81,3801.19 3336.81,3911.19
PWM2_3: FPC2.6 U2.3 U2.6 | length 4431.7
  Top Layer 1 w10: v1(4625,3369) 4625,3305 4668,3262 4738,3262 4747,3271 4904,3271 4916,3283 4943,3283 4971.66,3254.34 5227.34,3254.34 5241,3268 5390,3268 5401,3279 5413,3279 5424,3268 5522.5,3268 5528.5,3274 5596,3274 5606,3264 5764,3264 5776.69,3251.3 5802.78,3251.3 5810.08,3244 5878,3244 5884,3238 5884,2996 5904,2976 5987.18,2976 FPC2.6@5987.77,2976.59
  signal2 w10: v1(3363,4044) 3363,4279 3391,4307 3906,4307 3968,4245 3968,3866 4058,3776 4373,3776 4423,3726 4726,3726 4732,3720 4732,3631 4699,3598 4699,3467 4625,3393 v1(4625,3369)
  Bottom Layer 1 w10: U2.6@3311.22,3972 3311.22,4030.22 3326,4045 3377.14,4045 3387.99,4034.16 U2.3@3387.99,3972
PWM3_1: FPC2.7 U3.1 U3.4 | length 4201.8
  Top Layer 1 w10: FPC2.7@5987.77,2996.28 5988.41,2995.64 6052.36,2995.64 v1(6053,2995)
  signal1 w10: v1(3915.7,3958.85) 3842.41,3958.85 3828.4,3972.86 v1(3828.4,4025.4) 3828.4,4305.4 3904,4381 5848,4381 6005,4224 v1(6005,3810)
  signal2 w10: v1(6005,3810) 6005,3621 6018,3608 6058.28,3608 6064.14,3602.14 6064.14,3554.14 6064,3554 6064,3463 6039,3438 6011.86,3438 6006,3432.14 6006,3000.86 6011.86,2995 v1(6053,2995)
  Bottom Layer 1 w10: U3.4@3828.4,3977 v1(3828.4,4025.4) v1@3829,4026 ; U3.1@3905.17,3977 3905.17,3960.85 3907.17,3958.85 v1(3915.7,3958.85)
PWM3_2: FPC2.8 U3.2 U3.5 | length 4282.8
  Top Layer 1 w10: FPC2.8@5987.77,3015.97 5988.26,3015.48 6035.52,3015.48 v1(6036,3015)
  signal1 w10: v1(3804.33,3931.72) 3804.33,4310.33 3901,4407 5860,4407 6146,4121 6146,3610 6104,3568 6104,3481 6011,3388 6011,3022 6018,3015 v1(6036,3015)
  Bottom Layer 1 w10: U3.5@3802.81,3977 3803.57,3976.24 3803.57,3932.48 v1(3804.33,3931.72) 3805.81,3930.24 3814.76,3930.24 3822,3923 3869,3923 3878.75,3932.75 3878.75,3976.17 U3.2@3879.58,3977
PWM3_3: FPC2.9 U3.3 U3.6 | length 3593.5
  Top Layer 1 w10: FPC2.9@5987.77,3035.65 5988.1,3035.32 6145.68,3035.32 v1(6146,3035) ; v1(6074,3684) 6074,3651 6143,3582 v1(6143,3470)
  Bottom Layer 1 w10: U3.3@3853.99,3977 3854,4046 3835,4065 3800,4065 3777.22,4042.22 U3.6@3777.22,3977 3777.22,3854.78 3822,3810 4642,3810 4764,3688 5017.05,3688 5061.05,3644 5918,3644 5958,3684 v1(6074,3684) ; v1(6143,3470) 6144,3469 6144,3330 6152,3322 6152,3299 6148,3295 6148,3037 v1(6146,3035)
PWM4_1: FPC2.10 U6.1 U6.4 | length 2650.7
  Top Layer 1 w10: v1(5931,3036) 5949.43,3054.43 5986.87,3054.43 FPC2.10@5987.77,3055.34
  signal1 w10: v1(4301,4042) 4301.5,4042.5 4360.5,4042.5 v1(4361,4043)
  signal2 w10: v1(5853,3687) 5853,3684.91 5862,3675.91 5862,3663 5803,3604 5803,3409 5893,3319 5893,3121 5931,3083 v1(5931,3036)
  Bottom Layer 1 w10: v1(4301,4042) 4302.25,4040.75 U6.4@4302.25,3980 ; v1(4361,4043) 4379.02,4024.98 U6.1@4379.02,3980 4379.02,3868.98 4398,3850 4663,3850 4770,3743 5093,3743 5148,3688 5852,3688 v1(5853,3687)
PWM4_2: FPC2.11 U6.2 U6.5 | length 2675.6
  Top Layer 1 w10: v1(5902.86,3084) 5904.33,3082.52 5911.9,3082.52 5919.4,3075.02 FPC2.11@5987.77,3075.02
  signal2 w10: v1(5837,3667) 5785,3615 5785,3391.38 5874,3302.38 5874,3108 5880.02,3101.98 5884.88,3101.98 v1(5902.86,3084)
  Bottom Layer 1 w10: U6.5@4276.66,3980 4276.66,3913.34 ; U6.2@4353.43,3980 4353.43,3904.86 4347.57,3899 4291,3899 4276.66,3913.34 ; v1@5839,3669 v1(5837,3667) 5141,3667 5092,3716 4766,3716 4653,3829 4295,3829 4276.66,3847.34 4276.66,3913.34
PWM4_3: FPC2.12 U6.3 U6.6 | length 3871.9
  Top Layer 1 w10: v1(4021,3374) 4021,3420 4046,3445 4068,3445 4083,3460 4083,3607 4034,3656 4034,3769 4060,3795 4077,3795 4104,3822 4104,3956 4183.07,4035.07 v1(4251.07,4035.07) ; v1(5925.23,3117.44) 5925.95,3116.72 5925.95,3106.88 5938.13,3094.7 FPC2.12@5987.77,3094.7
  Bottom Layer 1 w10: v1(4021,3374) 4477,3374 4500,3351 4500,3349 4526,3323 4983,3323 5003,3303 5494,3303 5517,3326 5765,3326 5802,3363 5802,3492 5840,3530 5869,3530 5909,3570 5980,3570 5993,3557 5993,3121.86 5987.14,3116 5932.41,3116 5931.41,3117 5925.67,3117 v1(5925.23,3117.44) ; U6.6@4251.07,3980 v1(4251.07,4035.07) 4286,4070 4323.14,4070 4329,4064.14 4329,4036.8 4327.84,4035.64 U6.3@4327.84,3980
PWM5_1: FPC2.13 U5.1 U5.4 | length 3205.1
  Top Layer 1 w10: v1(4773,4042) 4773,4210 4798,4235 4882,4235 4887.86,4240.86 4887.86,4249.14 v1(4884,4253) ; FPC2.13@5987.77,3114.39 6046.61,3114.39 6057.12,3103.88 6057.12,3094.2 v1(6058.6,3092.72)
  signal1 w10: v1(4773,4042) 4811.19,4042 v1(4861.11,3992.08) ; v1(6165.12,3414.64) 6232,3481.53 v1(6232,3849)
  signal2 w10: v1@6059.47,3092.36 6099.36,3092.36 6131,3124 6131,3277 6165.12,3311.12 v1(6165.12,3414.64)
  Bottom Layer 1 w10: U5.4@4772.4,3984 4772.4,4041.4 v1(4773,4042) ; v1(4884,4253) 4884,4302 4945,4363 5987,4363 6232,4118 v1@6232,3850
PWM5_2: FPC2.14 U5.2 U5.5 | length 2481.8
  Top Layer 1 w10: v1(4686,3163) 4686,3214 4608.64,3291.36 4608.64,3332.36 4599,3342 4599,3391 4619,3411 4619,3512 4654,3547 4682.14,3547 4688,3552.86 4688,3595.2 4630,3653.2 4630,3767 4657,3794 4667.27,3794 4682,3808.73 4682,3906 v1(4708,3932) ; v1(5911.86,3135.81) 5912.35,3136.3 5935.66,3136.3 5937.89,3134.08 FPC2.14@5987.77,3134.08
  signal1 w10: v1(5330,3130.14) 5407.49,3130.14 5415.83,3138.49 5553.62,3138.49 5561.7,3130.41 5699.48,3130.41 5704.88,3135.81 v1(5911.86,3135.81)
  Bottom Layer 1 w10: v1(4686,3163) 5000,3163 5012,3175 5299,3175 5316.52,3157.48 5316.52,3145.71 5330,3132.23 v1(5330,3130.14) ; v1(4708,3932) 4708.86,3932.86 4746.81,3932.86 ; U5.5@4746.81,3984 4746.81,3932.86 ; U5.2@4823.58,3984 4822.75,3983.17 4822.75,3941.61 4808.14,3927 4752.66,3927 4746.81,3932.86
PWM5_3: FPC2.15 U5.3 U5.6 | length 2024.6
  Top Layer 1 w10: v1(5767,3364) 5792.56,3338.44 5796.02,3338.44 5807,3327.46 5807,3324.88 5808.64,3323.24 5808.64,3277.55 5808.23,3277.14 5808.23,3268.86 5814.09,3263 5890,3263 5903,3250 5903,3160.52 5908.86,3154.67 5986.87,3154.67 FPC2.15@5987.77,3153.76
  signal1 w10: v1(5576,3754) 5576,3470 5631,3415 5716,3415 v1(5767,3364)
  signal2 w10: v1(4798,3952) 4826,3952 4830,3948 4846,3948 5019,3775 5247,3775 5269,3753 5575,3753 v1(5576,3754) v1@5577,3755
  Bottom Layer 1 w10: U5.6@4721.22,3984 4721.22,4062.22 4735,4076 4792.13,4076 4797.99,4070.14 U5.3@4797.99,3984
PWM6_1: FPC2.16 U4.1 U4.4 | length 1664.7
  Top Layer 1 w10: v1(5306,3958) 5384,3958 v1@5392,3950 ; v1(5925,3176) 5927.09,3176 5929.64,3173.45 FPC2.16@5987.77,3173.45
  signal1 w10: v1(5229,3956) 5230,3957 5305,3957 v1(5306,3958) ; v1(5922,3701) 5977,3646 5977,3579 6005,3551 6066,3551 6076,3541 6076,3481 6031,3436 5999,3436 5938,3375 5938,3189 v1(5925,3176)
  Bottom Layer 1 w10: v1(5391,3950) 5833,3950 5922,3861 v1(5922,3701)
PWM6_2: FPC2.17 U4.2 U4.5 | length 1831
  Top Layer 1 w10: v1(5227,3393) 5227,3423 5254,3450 5272.14,3450 5278,3455.86 5278,3598 5247.1,3628.9 5223.25,3628.9 5209,3643.15 5209,3770.36 5226.64,3788 5268,3788 5287,3807 5287,3879.36 v1(5244.36,3922) ; v1(5764,3396) 5830,3330 5830,3293 5843,3280 5904,3280 5925,3259 5925,3204 5935,3194 FPC2.17@5974,3194
  Bottom Layer 1 w10: U4.5@5203.81,3990 5203.81,3932.19 5214,3922 v1(5244.36,3922) 5274.72,3922 5280.58,3927.86 U4.2@5280.58,3990 ; v1(5227,3393) 5240,3380 5240,3378 5254,3364 5355,3364 5380,3389 5620,3389 5661.39,3347.61 5723.82,3347.61 5729.68,3353.47 5729.68,3361.68 v1(5764,3396)
PWM6_3: FPC2.18 U4.3 U4.6 | length 2188.6
  Top Layer 1 w10: v1(5696.62,4238.1) 5872.9,4238.1 5961,4150 5961,3794 5891,3724 5891,3664 5842,3615 5842,3539.87 5817.57,3515.43 5817.57,3445.43 5825,3438 v1(5867,3438) ; v1(5899,3358) 5942,3315 5942,3263.21 5943,3262.21 5943,3219 5948.28,3213.72 5986.87,3213.72 FPC2.18@5987.77,3212.82
  signal1 w10: v1(5217,4076) 5379.1,4238.1 v1(5696.62,4238.1) ; v1(5867,3438) 5867,3390 v1(5899,3358)
  Bottom Layer 1 w10: U4.6@5178.22,3990 5179.04,3990.83 5179.04,4046.04 5208.57,4075.57 5249.13,4075.57 5254.99,4069.71 U4.3@5254.99,3990
PWM7_1: FPC2.19 U12.1 U12.4 | length 2310.5
  Top Layer 1 w10: FPC2.19@5987.77,3232.5 6197.04,3232.5 6198.07,3231.48 6201.67,3231.48 v1(6203.14,3230)
  signal1 w10: v1(5561,2581) 5561,2294 5605,2250 6075,2250 6205,2380 6205,2803.03 6203.14,2804.89 v1(6203.14,3230)
  Bottom Layer 1 w10: v1@5560,2580 v1(5561,2581) 5562,2582 U12.1@5616.83,2582 5616.83,2533.17 5625,2525 5687.75,2525 5693.6,2530.86 U12.4@5693.6,2582
PWM7_2: FPC2.20 U12.2 U12.5 | length 2323.3
  Top Layer 1 w10: FPC2.20@5987.77,3252.19 5988.68,3251.28 6184.92,3251.28 v1(6185,3251.36)
  signal1 w10: v1(5565,2610) 5585,2590 5585,2300 5615,2270 5915,2270 5940,2295 5980,2295 6000,2275 6065,2275 6184.28,2394.28 6184.28,3250.64 v1(6185,3251.36)
  Bottom Layer 1 w10: v1(5565,2610) 5590,2635 5650,2635 ; U12.2@5642.42,2582 5642.42,2627.42 5650,2635 ; U12.5@5719.19,2582 5719.19,2629.14 5713.34,2635 5650,2635
PWM7_3: FPC2.21 U12.3 U12.6 | length 1348.2
  Top Layer 1 w10: v1(5669.01,2551.45) 5669.5,2550.95 5744.5,2550.95 v1(5745,2550.46) 5855.46,2550.46 v1(5890,2585) ; FPC2.21@5987.77,3271.87 5988.64,3271 6165.99,3271 v1(6166.86,3270.14)
  signal1 w10: v1(6065,2740) 6166.14,2841.14 6166.14,3269.42 v1(6166.86,3270.14)
  Bottom Layer 1 w10: U12.3@5668.01,2582 5669.01,2581.01 v1(5669.01,2551.45) ; U12.6@5744.78,2582 5745,2581.79 v1(5745,2550.46) ; v1(5890,2585) 6010,2585 6065,2640 v1(6065,2740)
PWM8_1: FPC2.22 U11.1 U11.4 | length 2461.6
  Top Layer 1 w10: FPC2.22@5987.77,3291.56 5988.55,3290.78 6084.22,3290.78 v1(6085,3290)
  signal1 w10: v1(5235,2615) 5425,2615 5475,2565 5475,2315 5565,2225 v1(6045,2225) 6045.56,2225 v1@6045.73,2225.17
  Bottom Layer 1 w10: U11.1@5156.83,2578 5157.66,2578.83 5157.66,2617.66 5165,2625 5229.14,2625 5232.77,2621.37 5232.77,2578.83 U11.4@5233.6,2578 ; v1(6045,2225) 6045,2255 6085,2295 v1(6085,3290)
PWM8_2: FPC2.23 U11.2 U11.5 | length 2600
  Top Layer 1 w10: FPC2.23@5987.77,3311.24 5988.39,3310.62 6124.38,3310.62 v1(6125,3310)
  signal1 w10: v1(5219.14,2525) 5410,2525 5430,2505 5430,2280 5535,2175 v1(6045,2175)
  Bottom Layer 1 w10: U11.2@5182.42,2578 5182.42,2530.86 5188.28,2525 v1(5219.14,2525) 5250,2525 5259.19,2534.19 U11.5@5259.19,2578 ; v1(6045,2175) 6075,2175 6093.66,2193.66 6093.66,2238.66 6125,2270 v1(6125,3310)
PWM8_3: FPC2.24 U11.3 U11.6 | length 2458.9
  Top Layer 1 w10: v1(5208.72,2546.28) 5209.03,2546.6 5279.05,2546.6 5282.91,2550.46 v1(5285,2550.46) ; FPC2.24@5987.77,3330.93 5988.19,3330.51 6104.59,3330.51 v1(6105,3330.1)
  signal1 w10: v1(5285,2550.46) 5429.54,2550.46 5450,2530 5450,2300 5550,2200 v1(6045,2200)
  Bottom Layer 1 w10: U11.3@5208.01,2578 5208.72,2577.3 v1(5208.72,2546.28) ; U11.6@5284.78,2578 5285,2577.79 v1(5285,2550.46) ; v1(6045,2200) 6046.48,2201.48 6061.48,2201.48 6070,2210 6070,2250 6105,2285 v1(6105,3330.1)
PWM9_1: FPC2.25 U10.1 U10.4 | length 3708.3
  Top Layer 1 w10: FPC2.25@5987.77,3350.61 6229.53,3350.61 6244,3336.14 6244,2296.18 6203.78,2255.96 cw(c6119.37,2226.88) 6182.5,2163.75 cw(c6141.74,2204.49) 6123,2150 ccw(c6112.73,2119.8) 6090.29,2142.47 v1(6061.82,2114)
  signal1 w10: v1(4660,2625) 4660,2155 4701,2114 v1(6061.82,2114)
  Bottom Layer 1 w10: v1(4660,2625) 4705,2625 ; U10.1@4697.83,2572 4697.83,2617.83 4705,2625 ; U10.4@4774.6,2572 4775,2572.4 4775,2619.14 4769.14,2625 4705,2625
PWM9_2: FPC2.26 U10.2 U10.5 | length 3541
  Top Layer 1 w10: FPC2.26@5987.77,3370.3 5987.92,3370.15 6204.71,3370.15 v1(6204.86,3370)
  signal1 w10: v1(4730.11,2525) 4680,2474.89 4680,2159.64 4704.64,2135 6045,2135 ccw(c6045,2209.84) 6096.43,2155.47 ccw(c6045,2209.84) 6097.9,2156.9 6100.9,2159.9 ccw(c6130.07,2225.23) 6180.67,2174.64 ccw(c6130.07,2225.13) 6195.32,2254.32 6199.94,2258.94 6219,2278 6246,2305 6246,3346 6223,3369 6205.86,3369 v1(6204.86,3370)
  Bottom Layer 1 w10: U10.2@4723.42,2572 4724.25,2571.17 4724.25,2530.86 v1(4730.11,2525) 4794.14,2525 4799.37,2530.22 4799.37,2571.17 U10.5@4800.19,2572
PWM9_3: FPC2.27 U10.3 U10.6 | length 3370
  Top Layer 1 w10: v1(4750,2545) v1(4827.14,2545) ; FPC2.27@5987.77,3389.98 v1(6040,3390)
  signal1 w10: v1(4750,2545) 4750,2511.89 4700,2461.89 4700,2165 4710,2155 6062,2155 6078,2171 6078,2222.73 6226,2370.73 6226,3320 6157,3389 v1@6042,3389
  Bottom Layer 1 w10: U10.6@4825.78,2572 4824.96,2571.17 4824.96,2547.18 v1(4827.14,2545)
PWM10_1: FPC2.28 U7.1 U7.4 | length 3174.7
  Top Layer 1 w10: v1(4082,3086) 4082.37,3085.63 4082.37,3006.59 4082,3006.21 4082,3005 4059,2982 4059,2930 4076,2913 4076,2891 4108.36,2858.64 4108.36,2686.36 4073,2651 4073,2598.97 4078.86,2593.11 4078.86,2585.14 4096,2568 4146,2568 4161,2553 4207,2553 4219.38,2540.62 4219.38,2532.33 4206,2518.95 v1(4206,2516.86) ; v1(5928,3410) 5928.17,3409.83 5987.61,3409.83 FPC2.28@5987.77,3409.67
  Bottom Layer 1 w10: v1(4082,3086) 4083,3087 5866.14,3087 5872,3092.86 5872,3382 5900,3410 v1(5928,3410) ; v1(4206,2516.86) 4207.48,2518.33 4207.48,2522.57 4225.96,2541.05 4233.83,2541.05 4235.83,2543.05 U7.1@4235.83,2569 ; U7.1@4235.83,2541.05 4235.83,2518.17 4245,2509 4306,2509 4312.6,2515.6 U7.4@4312.6,2569
PWM10_2: FPC2.29 U7.2 U7.5 | length 3525.4
  Top Layer 1 w10: v1(4028,3064) 4028,2936 4058,2906 4058,2878 4092,2844 4092,2766 4066,2740 4042,2740 4027,2725 4027,2555.86 4032.86,2550 4138,2550 4153,2535 4190.4,2535 v1(4191.26,2534.14) ; FPC2.29@5987.77,3429.35 6072.65,3429.35 v1@6084.62,3417.38
  Bottom Layer 1 w10: v1(4028,3064) 5993,3064 6062,3133 6062,3394 v1@6084,3416 ; v1(4191.26,2534.14) 4192,2534.88 4192,2583 4230.42,2621.42 4261.42,2621.42 ; U7.2@4261.42,2569 4261.42,2621.42 ; U7.5@4338.19,2569 4338.19,2618.81 4329,2628 4268,2628 4261.42,2621.42
  other v1: 6083,3416
PWM10_3: FPC2.30 U7.3 U7.6 | length 2959.9
  Top Layer 1 w10: v1(4281.43,2608.1) 4312.1,2608.1 4324,2620 4324,2731.14 4329.86,2737 4364,2737 4384,2757 4384,2879 4336,2927 4336,2960.14 4341.86,2966 4347,2966 4390,3009 v1(4390,3109) ; v1(5933,3442.14) 5935.09,3442.14 5941.08,3448.13 5958.13,3448.13 5959.03,3449.04 FPC2.30@5987.77,3449.04
  signal2 w10: v1(4281.43,2608.1) 4479.83,2608.1 4499.74,2588.18 4499.74,2553.74 v1(4499,2553)
  Bottom Layer 1 w10: v1(4281.43,2608.1) 4282.9,2606.62 4282.9,2601.41 4287.01,2597.3 U7.3@4287.01,2569 ; U7.6@4363.78,2569 4363.78,2620.78 4373,2630 4470,2630 4504,2596 4504,2566 4499,2561 v1(4499,2553) ; v1(4390,3109) 5372,3109 5549,3286 5796,3286 5845,3335 5845,3385 5910,3450 5925.91,3450 5933,3442.91 v1(5933,3442.14)
PWM11_1: FPC2.31 U8.1 U8.4 | length 3274.9
  Top Layer 1 w10: FPC2.31@5987.77,3468.72 5987.94,3468.89 6027.61,3468.89 v1(6027.79,3469.06)
  signal1 w10: v1(3735,2568) 3735,2713 4085,3063 4114,3063 4148,3097 4148,3328 4179,3359 4428,3359 4429,3358 4587,3358 4613,3332 4963,3332 4988,3307 5824,3307 5843,3326 5843,3451 5856,3464 5995.5,3464 6000.57,3469.06 v1(6027.79,3469.06)
  Bottom Layer 1 w10: v1@3734,2567 v1(3735,2568) U8.1@3773.83,2568 3773.83,2620.83 3783,2630 3844.75,2630 3850.6,2624.14 U8.4@3850.6,2568
PWM11_2: FPC2.32 U8.2 U8.5 | length 3727.4
  Top Layer 1 w10: v1(3653,2888) 3653,2692 3702,2643 3702,2549 3713,2538 v1(3740,2538) ; FPC2.32@5987.77,3488.41 6037.59,3488.41 6040.91,3491.72 v1(6043,3491.72)
  signal1 w10: v1(3653,2888) 3653,2921 3666,2934 3731,2934 3791,2994 3791,3215 4058,3482 v1(4058,3603)
  Bottom Layer 1 w10: v1(3740,2538) 3740,2526 3756.14,2509.86 3799.42,2509.86 ; U8.2@3799.42,2568 3799.42,2509.86 ; U8.5@3876.19,2568 3875.85,2567.66 3875.85,2509.86 3869.99,2504 3805.28,2504 3799.42,2509.86 ; v1(4058,3603) 6002,3603 6043,3562 v1(6043,3491.72)
PWM11_3: FPC2.33 U8.3 U8.6 | length 3012.3
  Top Layer 1 w10: v1(3839,2522.86) 3839,2580 3851,2592 v1(3902,2592) ; v1(5849.35,3300.35) 5850.83,3301.83 5850.83,3307.29 5852.83,3309.29 5852.83,3365.83 5894,3407 5894,3492 5910.09,3508.09 FPC2.33@5987.77,3508.09
  signal1 w10: v1(3902,2592) 3902,2796 4196,3090 4196,3289 4217,3310 4307,3310 4335,3338 4578,3338 4608,3308 4954,3308 4983,3279 5828,3279 v1(5849.35,3300.35)
  Bottom Layer 1 w10: U8.3@3825.01,2568 3825.01,2539.7 3835,2529.72 3835,2528.95 3839,2524.95 v1(3839,2522.86)
PWM12_1: FPC2.34 U9.1 U9.4 | length 4110.6
  Top Layer 1 w10: v1(3264.97,2575.03) 3263.49,2576.51 3248.49,2576.51 3243,2582 3146,2582 3131,2597 3131,2768 3179,2816 3179,2988 3196,3005 3196,3253.14 3201.86,3259 3417,3259 3428,3270 v1(3428,3424) ; v1(5863,3564) 5899.22,3527.78 FPC2.34@5987.77,3527.78
  Bottom Layer 1 w10: v1@3264,2576 v1(3264.97,2575.03) U9.1@3313.84,2575.03 3313.84,2621.84 3322,2630 3380,2630 3390.61,2619.39 U9.4@3390.61,2575.03 ; v1(3428,3424) 5766,3424 5782,3440 5782,3496 5850,3564 v1(5863,3564)
PWM12_2: FPC2.35 U9.2 U9.5 | length 4421
  Top Layer 1 w10: v1@3131,3293 v1(3132,3292) 3133,3291 3133,2960.26 3158.37,2934.89 3158.37,2832.37 3030,2704 3030,2646 3031,2645 3031,2634 3102,2563 v1(3229,2563) ; v1(5928,3547) 5928.23,3547.23 5987.54,3547.23 FPC2.35@5987.77,3547.46
  Bottom Layer 1 w10: v1(3132,3292) 4088,3292 4117,3263 4282,3263 4300,3281 5204,3281 5205,3280 5504,3280 5530,3306 5786,3306 5823.5,3343.5 5823.5,3463.29 5864.62,3504.41 5885.41,3504.41 v1(5928,3547) ; v1(3229,2563) 3236,2556 3252.14,2556 3329.14,2479 3345.28,2479 ; U9.2@3339.43,2575.03 3339.43,2484.86 3345.28,2479 ; U9.5@3416.2,2575.03 3416.2,2484.86 3410.34,2479 3345.28,2479